# Altium PCB PCB1(sanya).PcbDoc
Units mil, origin at the board's own origin, x right, y up, seen from the top; angles counter-clockwise.
Board outline 1440 x 725 mil, 2 copper layers (Top Layer, Bottom Layer); 14 components, 10 nets, 60 pads, 6 vias.
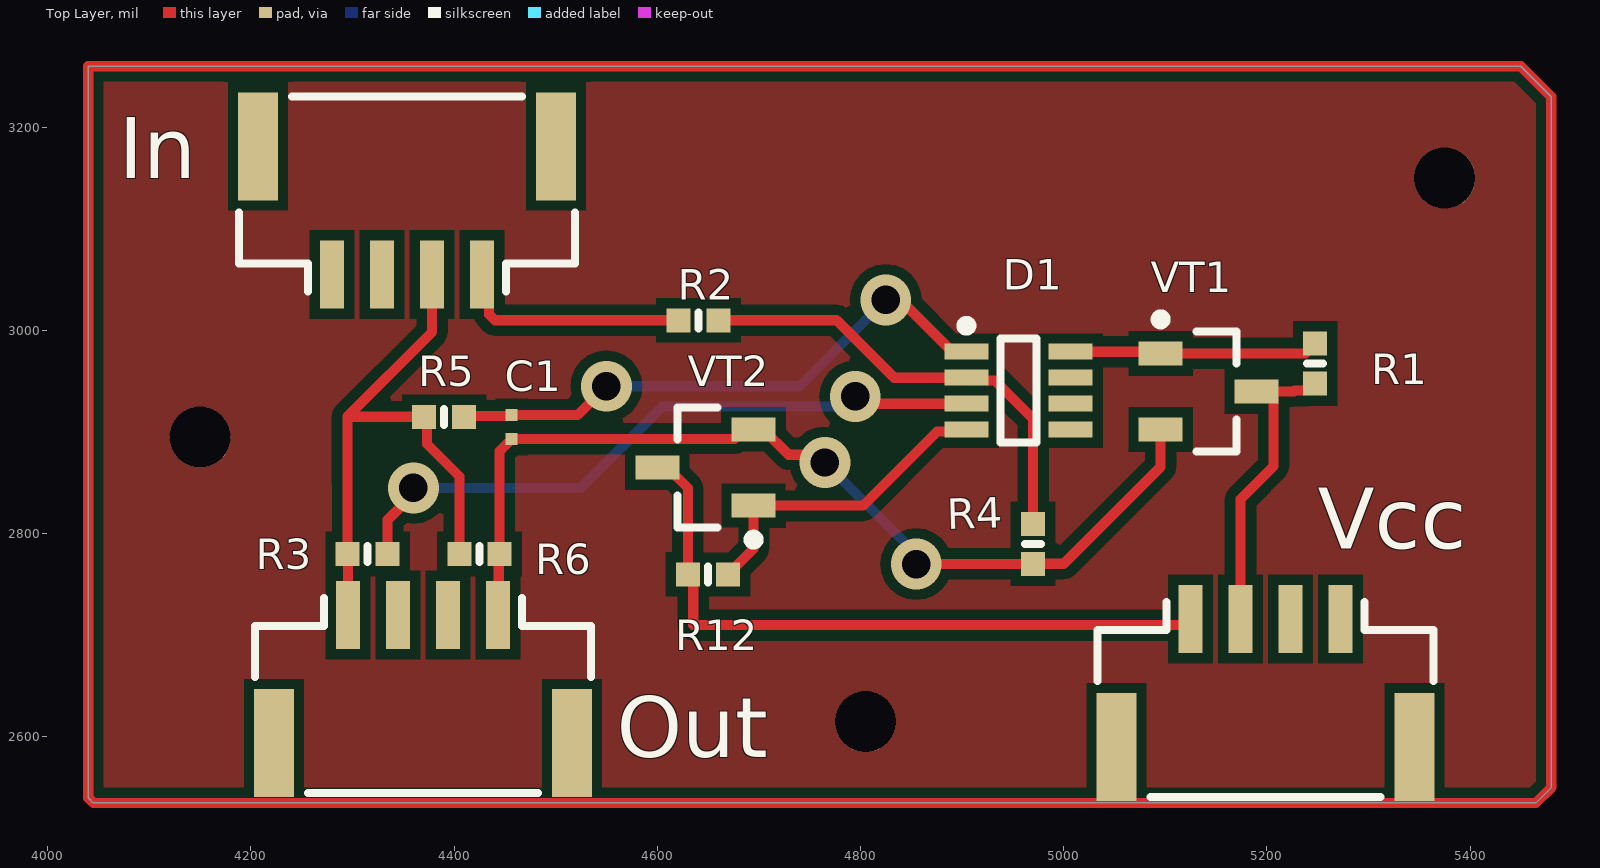
[diagram p0: Top Layer view]
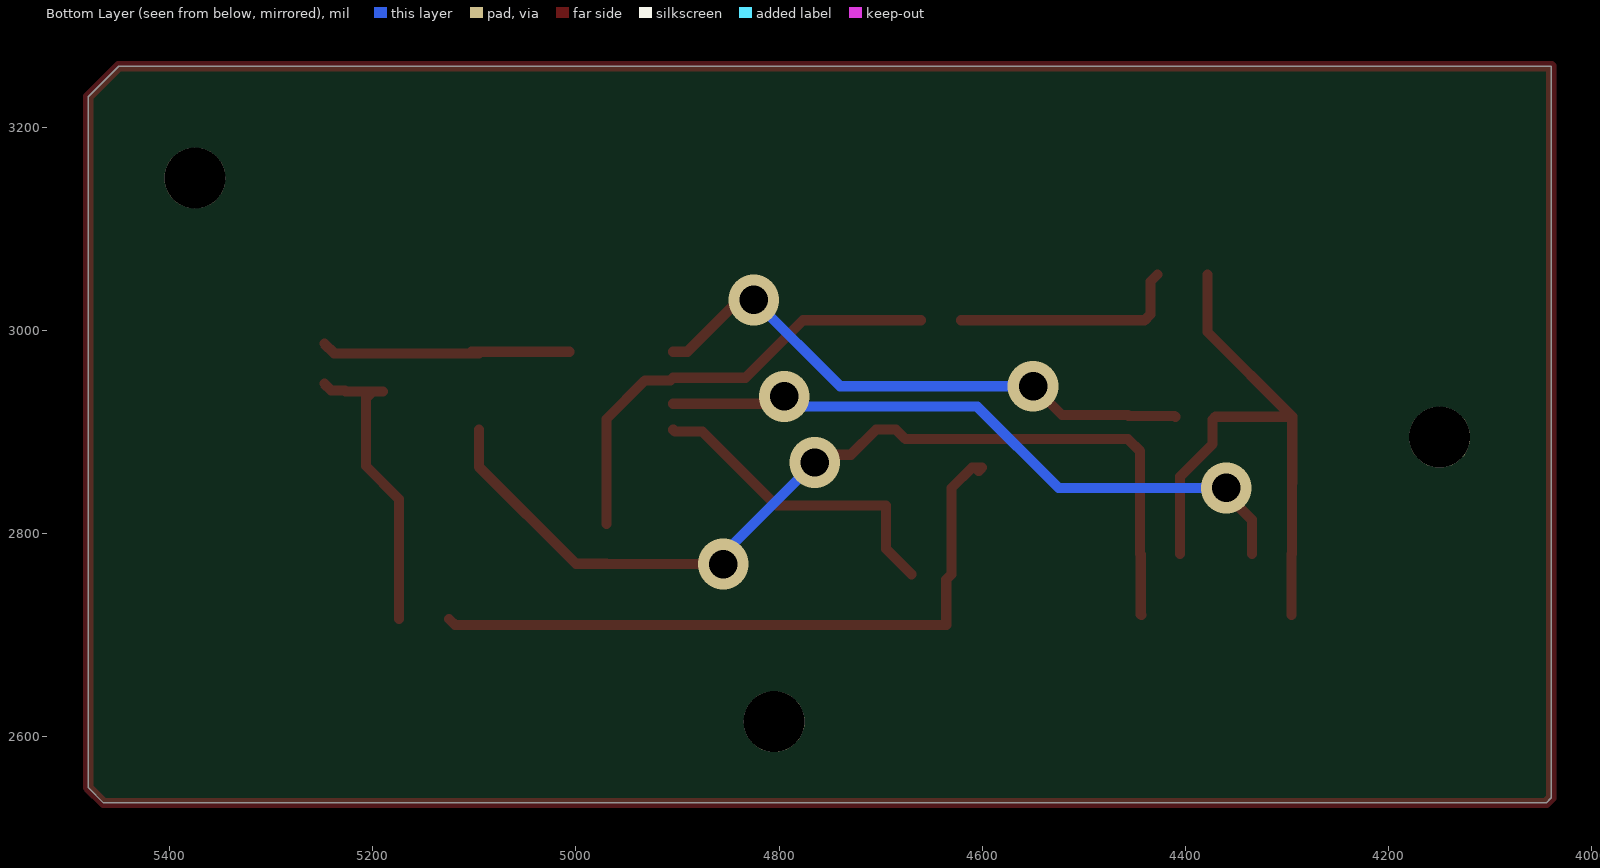
[diagram p1: Bottom Layer view, seen from below]
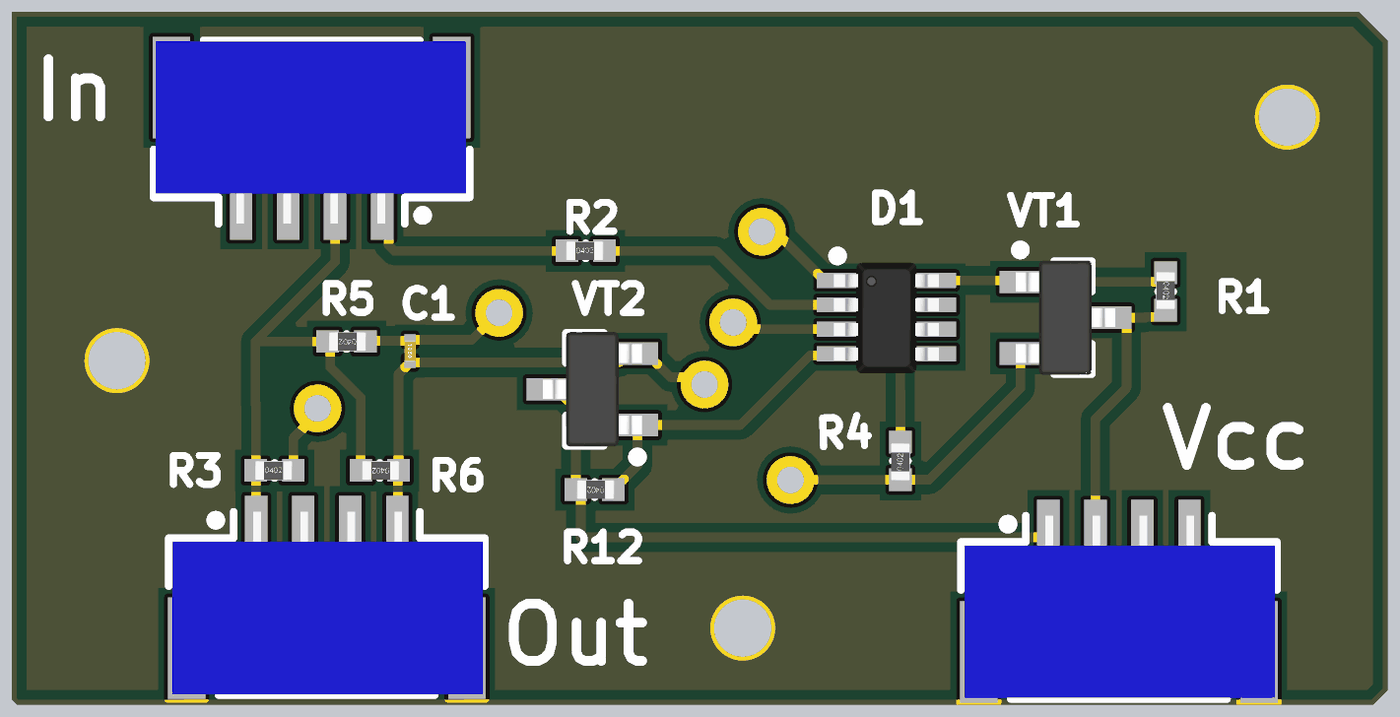
[diagram p2: 3D render of the assembled board from above, using the file's embedded part models]

## Layer stack, top to bottom
Top Solder: solder mask 0.4, Solder Resist, Dk 3.5
Top Layer: signal copper 1.4
Dielectric 1: dielectric 12.6, FR-4, Dk 4.8
Bottom Layer: signal copper 1.4
Bottom Solder: solder mask 0.4, Solder Resist, Dk 3.5

## Board outline
4040,2540 4045,2535 5465,2535 5480,2550 5480,3230 5450,3260 4040,3260

## Design rules (kind name [scope] priority, off if disabled: settings)
Clearance [All] p1: gap=10 ignorepadtopadclearanceinfootprint=FALSE except(0: Arc-Hole Track-Hole SMDPad-Hole THPad-Hole Via-Hole Fill-Hole Poly-Hole Region-Hole Text-Hole)
PolygonConnect [All] p1: connectstyle=Relief reliefconductorwidth=10 reliefentries=4 polygonreliefangle="90 Angle" airgapwidth=10
RoomDefinition Sheet(sanya) [InComponentClass('Sheet(sanya)')] p1: confinementstyle=ConfineIn formatcopy=TRUE lockcomponents=FALSE outline 0,0 2000,0 2000,1000 0,1000
RoutingVias [All] p1: holewidth=28 width=50 viastyle="Through Hole" minholewidth=28 minwidth=50 maxholewidth=28 maxwidth=50
SolderMaskExpansion [All] p1: expansion=4 istentingtop=FALSE
Width [All] p1: maxlimit=10 minlimit=10 preferedwidth=10
30 further rules are at their usual default settings.

## Components (designator, comment, footprint, x,y, rotation, side; value= is the part's Value field where it differs from the comment)
C1 "Ceramic capacitor, 0.1μF, X7R, ±10%, 16V, 0201, -55...+125°C" "CAP: 0201" 4456.81,2905 r90 top value=0.1μF
D1 "IC op amplifier, Rail-to-Rail, 3 MHz, 2.7...5.5V, -40...+125°C, SOT23-5" SOT23-8 4955.43,2940.63 r0 top
In "Connector, 4pin, 1.25mm, 50VDC, 1A" "CON: SM04B-GHS" 4353.82,3229.21 r180 top
Out "Connector, 4pin, 1.25mm, 50VDC, 1A" "CON: SM04B-GHS" 4369.61,2545.79 r0 top
R1 "Resistor film, 100R, ±5%, 0402, 0.063W, -55...+125°C" "RES: 0402" 5247.65,2967.33 r270 top value=100R
R2 "Resistor film, 10k, ±5%, 0402, 0.063W, -55...+125°C" "RES: 0402" 4640.63,3010 r0 top value=10k
R3 "Resistor film, 10k, ±5%, 0402, 0.063W, -55...+125°C" "RES: 0402" 4315,2780 r0 top value=10k
R4 "Resistor film, 100k, ±5%, 0402, 0.063W, -55...+125°C" "RES: 0402" 4970,2790 r90 top value=100k
R5 "Resistor film, 5.1k, ±5%, 0402, 0.063W, -55...+125°C" "RES: 0402" 4390.31,2915 r180 top value=5.1k
R6 "Resistor film, 1k, ±5%, 0402, 0.063W, -55...+125°C" "RES: 0402" 4425,2780 r180 top value=1k
R12 "Resistor film, 100R, ±5%, 0402, 0.063W, -55...+125°C" "RES: 0402" 4650,2760 r180 top value=100R
Vcc "Connector, 4pin, 1.25mm, 50VDC, 1A" "CON: SM04B-GHS" 5198.7,2541.77 r0 top
VT1 "PNP transistor, 45V, 100mA, 100MHz, 300mW, 0.65V, 220, SOT-23, -55...+125°C" SOT23 5142.76,2940 r0 top
VT2 "NPN transistor, 45V, 100mA, 100MHz, 300mW, 0.6V, 420, SOT-23, -55...+125°C" SOT23 4647.56,2865 r180 top

## Footprints (in the part's own frame and the unit in brackets; to place one, negate y for a bottom-side part, rotate by r counter-clockwise, add the part's x,y. Pads: shape width x height; smd on the part's side, far side on the other; paste and mask are expansions set on the pad)
"CAP: 0201" [mm]
  rect 0.3x0.3 smd: 1(-0.3,0) 2(0.3,0)
  body extent -0.3,-0.15 0.3,0.15, height 0.31
"CON: SM04B-GHS" [mm]
  rect 1x2.7 smd: 0(-3.725,1.225) 0(3.725,1.225)
  rect 0.6x1.7 smd: 1(-1.875,4.425) 2(-0.625,4.425) 3(0.625,4.425) 4(1.875,4.425)
  round 0.5 on Mech13: ""(-3.65,4.4)
  round 0.5 on Top Overlay: ""(-2.95,4.625)
  silkscreen extent -4.2,-0.03 4.2,4.85, body extent -4.1,0 4.15,4.85, height 4.32
"RES: 0402" [mm]
  rect 0.6x0.6 smd: 1(-0.5,0) 2(0.5,0)
  silkscreen extent 0,-0.2 0,0.2, body extent -0.52,-0.25 0.47,0.25, height 0.34
SOT23 [mm]
  rect 1.1x0.6 smd: 1(-1.2,0.95) 2(-1.2,-0.95) 3(1.2,0)
  round 0.5 on Mech1: ""(-0.9,1.1)
  silkscreen extent -1.32,-1.5 0.7,1.92, body extent -1.32,-1.52 1.32,1.52, height 1.12
SOT23-8 [mm] "pitch 0.95 mm"
  rect 1.1x0.4 smd: 1(-1.3,0.975) 2(-1.3,0.325) 3(-1.3,-0.325) 4(-1.3,-0.975) 5(1.3,-0.975) 6(1.3,-0.325) 7(1.3,0.325) 8(1.3,0.975)
  round 0.5 on Mech1: ""(-0.9,1)
  silkscreen extent -1.42,-1.3 0.45,1.75, body extent -1.4,-1.5 1.4,1.45, height 1.2

## Part data
C1: library part Ceramic_0201, Manufacturer=Yageo, Package=0201, PartNumber=CC0201KRX7R7BB103, Temperature=-55...+125°C, Tolerance=±10%, TypeCapacitor="Ceramic capacitor", TypeDielectric=X7R, Voltage=16V, HelpURL=https://www.digikey.com/product-detail/en/yageo/CC0201KRX7R7BB103/311-1404-1-ND/2833710, ValueManufacturerPartNumber="Ceramic capacitor, 0.1μF, X7R, ±10%, 16V, 0201, -55...+125°C"
D1: library part OPA2337EA/3K, "OP amplifier", Manufacturer="Texas Instruments", Package=SOT23-5, Temperature=-40...+125°C, ComponentType="IC op amplifier", GainBandwidth="3 MHz", HelpURL=https://www.digikey.com/product-detail/en/texas-instruments/OPA2337EA-3K/296-26252-1-ND/2254915, OutputType=Rail-to-Rail, PartNumber=OPA2337EA/3K, Supply=2.7...5.5V, ValueManufacturerPartNumber="IC op amplifier, Rail-to-Rail, 3 MHz, 2.7...5.5V, -40...+125°C, SOT23-5"
In Out Vcc: library part Connector_SM04B, CurrentMax=1A, Manufacturer=JST, PartNumber=SM04B-GHS, VoltageMax=50VDC, CommentText="\"Разъем\"", HelpURL=https://www.digikey.com/product-detail/en/jst-sales-america-inc/SM04B-GHS-TB-LF-SN/455-1566-1-ND/807834, Multichannel=4pin, Pitch=1.25mm, TypeConnector=Connector, ValueManufacturerPartNumber="Connector, 4pin, 1.25mm, 50VDC, 1A"
R1 R2 R3 R4 R5 R6 R12: library part Resistor_0402, Manufacturer=Yageo, Package=0402, PartNumber=RC0402JR-07100RL, Power=0.063W, Temperature=-55...+125°C, Tolerance=±5%, TypeResistor="Resistor film", HelpURL=https://www.digikey.com/product-detail/en/yageo/RC0402JR-07100RL/311-100JRCT-ND/729362
  R1 R12: ValueManufacturerPartNumber="Resistor film, 100R, ±5%, 0402, 0.063W, -55...+125°C"
  R2 R3: ValueManufacturerPartNumber="Resistor film, 10k, ±5%, 0402, 0.063W, -55...+125°C"
  R4: ValueManufacturerPartNumber="Resistor film, 100k, ±5%, 0402, 0.063W, -55...+125°C"
  R5: ValueManufacturerPartNumber="Resistor film, 5.1k, ±5%, 0402, 0.063W, -55...+125°C"
  R6: ValueManufacturerPartNumber="Resistor film, 1k, ±5%, 0402, 0.063W, -55...+125°C"
VT1: library part BJT_PNP_132, CurrentCE=100mA, CurrentGain=220, Frequency=100MHz, Manufacturer="ON Semiconductor", MaxPower=300mW, Package=SOT-23, PartNumber=2N3638, Temperature=-55...+125°C, VoltageCE=45V, VoltageSaturation=0.65V, HelpURL=https://www.digikey.com/product-detail/en/on-semiconductor/BC857BLT3G/BC857BLT3GOSCT-ND/2704963, TypeTransistor="PNP transistor", ValueManufacturerPartNumber="PNP transistor, 45V, 100mA, 100MHz, 300mW, 0.65V, 220, SOT-23, -55...+125°C"
VT2: library part BJT_NPN_123, CurrentCE=100mA, CurrentGain=420, Frequency=100MHz, Manufacturer="ON Semiconductor", MaxPower=300mW, Package=SOT-23, PartNumber=2N697, Temperature=-55...+125°C, VoltageCE=45V, VoltageSaturation=0.6V, HelpURL=https://www.digikey.com/product-detail/en/on-semiconductor/BC847CLT1G/BC847CLT1GOSCT-ND/917836, TypeTransistor="NPN transistor", ValueManufacturerPartNumber="NPN transistor, 45V, 100mA, 100MHz, 300mW, 0.6V, 420, SOT-23, -55...+125°C"

## Free pads (board coordinates)
  round 60 hole 60: 0(4150,2895) 0(4805,2615) 0(5375,3150)

## Via types
v1: diameter 50, hole 28, Top Layer to Bottom Layer, 6 vias

## Nets (pads, with @x,y where several pads share a name; then routed paths per layer and width w, separated by ;. In a path a pad name is that pad's centre, name@x,y a point inside that pad or via, vN(x,y) a via of type N, cw(c..) or ccw(c..) an arc to the next point about the centre after c; other vN are vias at no path point)
GND: In.2 Out.1 R3.1 R5.2 R6.2 | length 594.9
  Top Layer w10: Out.1 4295.55,2720.24 4295.55,2779.76 R3.1 4295.31,2849.68 4295,2850 4295,2915 ; In.2 4378.43,2998.43 4295,2915 ; R6.2 4405.31,2856.25 4373.38,2888.19 4373.38,2912.25 R5.2 4295,2915
NetC1_1: C1.1 Out.4 R4.1 R6.1 VT1.2 VT2.2 | length 958.4
  Top Layer w10: Out.4 4444.06,2720.63 4444.06,2779.37 R6.1 4444.69,2881.06 C1.1 4675.75,2893.19 4684.96,2902.4 4704.65,2902.4 4729.39,2877.65 4757.35,2877.65 v1(4765,2870) ; v1(4855,2770) 4855.16,2770.16 4969.84,2770.16 R4.1 5000,2770.32 5095.51,2865.83 VT1.2
  Bottom Layer w10: v1(4765,2870) 4855,2780 v1(4855,2770)
NetC1_2: C1.2 D1.1 R5.1 | length 563
  Top Layer w10: R5.1 4410.91,2915.91 4455.91,2915.91 C1.2 4521.62,2916.81 4549.81,2945 v1(4550,2945) ; v1(4825,3030) 4832.65,3022.35 4847.14,3022.35 4890.47,2979.02 D1.1
  Bottom Layer w10: v1(4550,2945) 4740,2945 v1(4825,3030)
NetD1_2: D1.2 R2.2 R4.2 | length 453.1
  Top Layer w10: R2.2 4776.57,3010 4833.14,2953.43 D1.2 4906.97,2950.71 4932.12,2950.71 4969.96,2912.87 4969.96,2864.7 4970,2864.66 R4.2
NetD1_3: D1.3 R3.2 | length 660
  Top Layer w10: R3.2 4334.69,2813.75 4360,2839.06 v1(4360,2845) ; v1(4795,2935) 4802.17,2927.83 D1.3
  Bottom Layer w10: v1(4360,2845) 4525,2845 4605,2925 4785,2925 v1(4795,2935)
NetD1_4: D1.4 R12.1 VT2.1 | length 318.4
  Top Layer w10: R12.1 4694.8,2785.12 VT2.1 4802.6,2827.6 4875.38,2900.38 4902.39,2900.38 D1.4
NetD1_8: D1.8 R1.1 VT1.1 | length 252.3
  Top Layer w10: D1.8 VT1.1@5102.8,2979.02 ; VT1.1 5238.03,2977.4 R1.1
NetIn_1: In.1 R2.1 | length 230.9
  Top Layer w10: In.1 4434.45,3048.19 4434.45,3015.86 4440.31,3010 R2.1
NetR1_2: R1.2 Vcc.2 VT1.3 | length 301.1
  Top Layer w10: Vcc.2 5174.09,2834 5206.65,2866.56 5206.65,2933.19 VT1.3@5199.84,2940 ; VT1.3 VT1.3@5199.84,2940 ; R1.2 5240.83,2940.83 5227.49,2940.83 5226.65,2940 VT1.3@5199.84,2940
NetR12_2: R12.2 Vcc.1 VT2.3 | length 671.7
  Top Layer w10: VT2.3@4603.5,2861.81 VT2.3 4610.16,2865 4630.31,2844.84 R12.2 4635.48,2754.84 4635.48,2710 5118.9,2710 Vcc.1
pads on no net: D1. D1.5 D1.6 D1.7 In. In.0 In.3 In.4 Out. Out.0 Out.2 Out.3 Vcc. Vcc.0 Vcc.3 Vcc.4 VT1. VT2.
copper on no net: | length 4300.7
  Top Layer w10: 4040,2540 4045,2535 5465,2535 5480,2550 5480,3230 5450,3260 4040,3260 4040,2540

## Polygon pours and split planes (outlines as drawn)
no net on Top Layer "NONET_L01_P-001" (solid, pour order 1): 4040,3260 4040,2540 4045,2535 5465,2535 5480,2550 5480,3230 5450,3260
no net on Top Layer "NONET_L01_P-001" (solid, shelved, pour order 0): 4040,3260 4040,2540 4045,2535 5465,2535 5480,2550 5480,3230 5450,3260